# EAGLE board mainboard_eurobotics2010_r8 (EAGLE 4.16), part 1 of 2
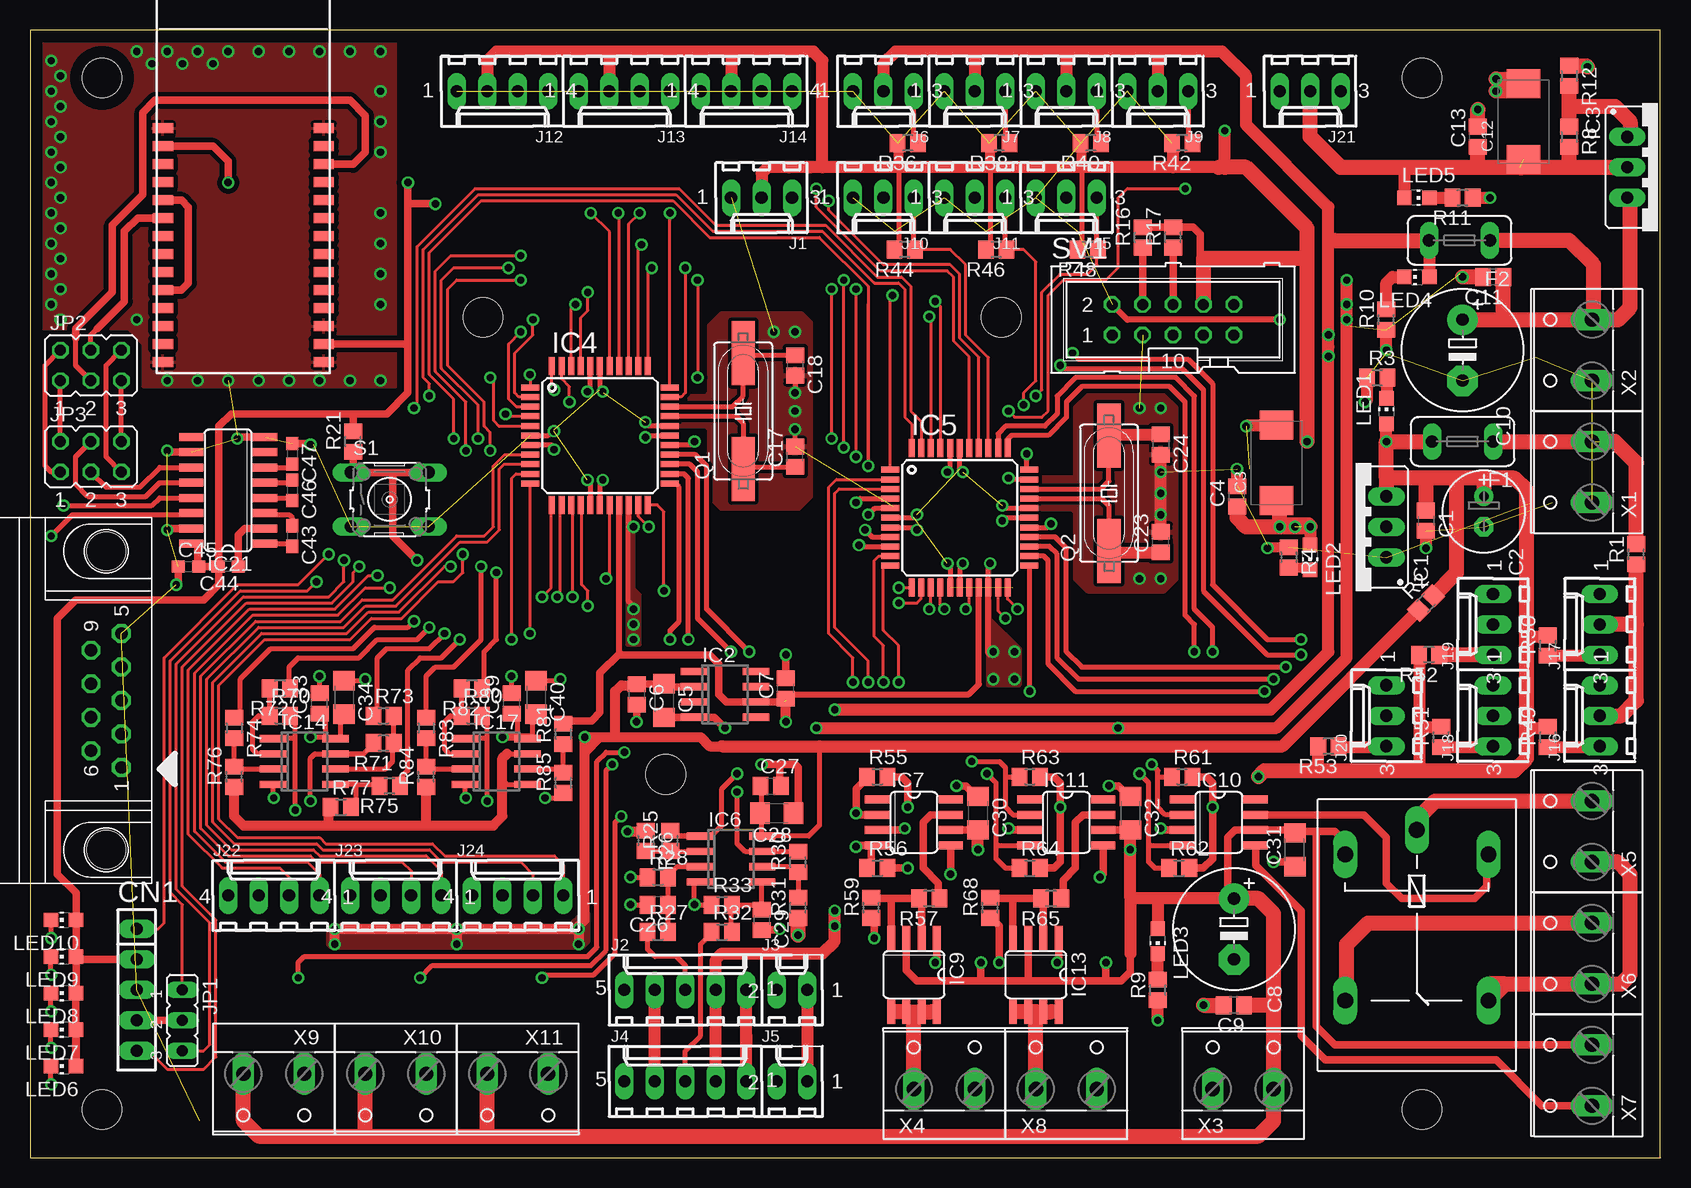
[diagram p0: board, top side]
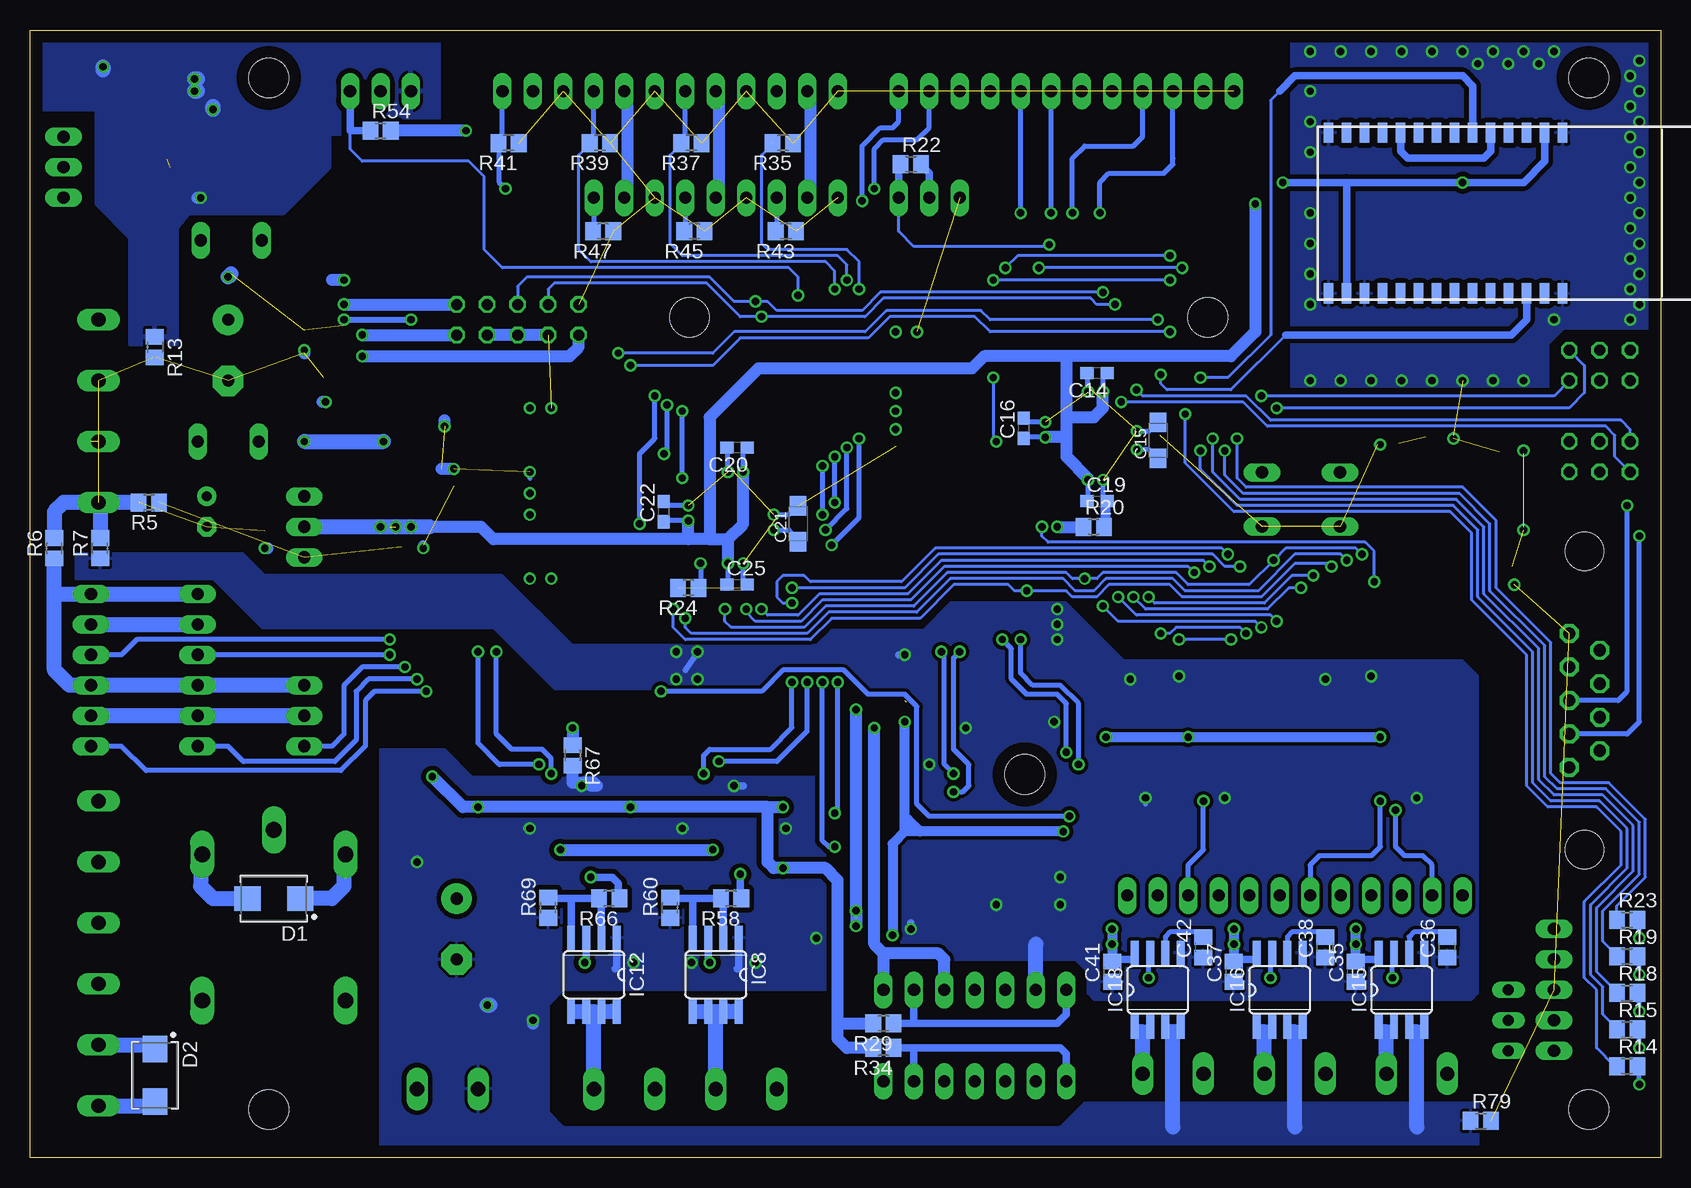
[diagram p1: board, bottom side, seen from below]

Size 135.89 x 94 mm. Coordinates in mm from the lower left corner, seen from the top.
Outline: 135.86,93.98 135.86,0.03 135.89,0 0,0 0,94 135.86,94
Copper layers (1*16): Top 0.035mm / dielectric 1.5mm / Bottom 0.035mm
Design rules "olimex": minimum track width 10mil, minimum drill 24mil, track to track 8mil, track to pad 8mil, pad to pad 8mil, via to via 8mil, smd to smd 8mil, copper to edge 40mil, drill to drill 8mil, minimum pad ring 8mil, minimum via ring 8mil, stop-mask expansion 4mil, vias tented up to drill 0mil, thermal gap 10mil
Holes 3.3 mm at 6,4 116,4 6,90 116,90 80.93,70.04 37.75,70.04 52.99,31.94

## Footprints (pad centres in the part's own frame; a part is rotated, then mirrored left to right if it is on the bottom)
C0805 = smd 1.3 x 1.5: 1 -0.85,0; 2 0.85,0
E2,5-7 = drill 0.813 pad 1.6 round: + -1.27,0 | drill 0.813 pad 1.6 octagon: - 1.27,0
SMC_D = smd 2.4 x 2.8: + -3.15,0; - 3.15,0
C1206 = smd 1.6 x 1.8: 1 -1.4,0; 2 1.4,0
E5-10,5 = drill 1.016 pad 2.54 round: + -2.54,0 | drill 1.016 pad 2.54 octagon: - 2.54,0
C0603 = smd 1.1 x 1: 1 -0.85,0; 2 0.85,0
SMC_A = smd 1.6 x 1.4: + -1.5,0; - 1.5,0
SIP-100-5V = drill 1.016 long: 1 -5.08,0; 2 -2.54,0; 3 0,0; 4 2.54,0; 5 5.08,0
D-09F/90 = drill 1.016 pad 1.575 octagon: 1 -5.588,-1.27; 2 -2.794,-1.27; 3 0,-1.27; 4 2.794,-1.27; 5 5.588,-1.27; 6 -4.191,1.27; 7 -1.397,1.27; 8 1.397,1.27; 9 4.191,1.27 | hole 3.2: 12.446,0; -12.446,0
DIOM5436X265N = smd 2.2 x 2.05: A 2.2,0; K -2.2,0
TE5 = drill 1.016 long: 1 -2.54,0; 2 2.54,0
317TS = drill 1.016 long: 1 -2.54,-2.54; 2 0,-2.54; 3 2.54,-2.54
SOIC8 = smd 0.6 x 2.2: 1 -1.905,-2.6; 2 -0.635,-2.6; 3 0.635,-2.6; 4 1.905,-2.6; 5 1.905,2.6; 6 0.635,2.6; 7 -0.635,2.6; 8 -1.905,2.6
TQFP44 = smd 1.5 x 0.5: 1 -5.8,4; 2 -5.8,3.2; 3 -5.8,2.4; 4 -5.8,1.6; 5 -5.8,0.8; 6 -5.8,0; 7 -5.8,-0.8; 8 -5.8,-1.6; 9 -5.8,-2.4; 10 -5.8,-3.2; 11 -5.8,-4; 23 5.8,-4; 24 5.8,-3.2; 25 5.8,-2.4; 26 5.8,-1.6; 27 5.8,-0.8; 28 5.8,0; 29 5.8,0.8; 30 5.8,1.6; 31 5.8,2.4; 32 5.8,3.2; 33 5.8,4 | smd 0.5 x 1.5: 12 -4,-5.8; 13 -3.2,-5.8; 14 -2.4,-5.8; 15 -1.6,-5.8; 16 -0.8,-5.8; 17 0,-5.8; 18 0.8,-5.8; 19 1.6,-5.8; 20 2.4,-5.8; 21 3.2,-5.8; 22 4,-5.8; 34 4,5.8; 35 3.2,5.8; 36 2.4,5.8; 37 1.6,5.8; 38 0.8,5.8; 39 0,5.8; 40 -0.8,5.8; 41 -1.6,5.8; 42 -2.4,5.8; 43 -3.2,5.8; 44 -4,5.8
SO08 = smd 0.6 x 2.2: 1 -1.905,-2.6; 2 -0.635,-2.6; 3 0.635,-2.6; 4 1.905,-2.6; 5 1.905,2.6; 6 0.635,2.6; 7 -0.635,2.6; 8 -1.905,2.6
SO08' = smd 0.66 x 2.032: 1 -1.905,-3.073; 2 -0.635,-3.073; 3 0.635,-3.073; 4 1.905,-3.073; 5 1.905,3.073; 6 0.635,3.073; 7 -0.635,3.073; 8 -1.905,3.073
WT11 = smd 1.7 x 0.8: 1 -6.7,2.5; 2 -6.7,1; 3 -6.7,-0.5; 4 -6.7,-2; 5 -6.7,-3.5; 6 -6.7,-5; 7 -6.7,-6.5; 8 -6.7,-8; 9 -6.7,-9.5; 10 -6.7,-11; 11 -6.7,-12.5; 12 -6.7,-14; 13 -6.7,-15.5; 14 -6.7,-17; 15 6.7,-17; 16 6.7,-15.5; 17 6.7,-14; 18 6.7,-12.5; 19 6.7,-11; 20 6.7,-9.5; 21 6.7,-8; 22 6.7,-6.5; 23 6.7,-5; 24 6.7,-3.5; 25 6.7,-2; 26 6.7,-0.5; 27 6.7,1; 28 6.7,2.5
SO16 = smd 0.66 x 2.032: 1 -4.445,-3.073; 2 -3.175,-3.073; 3 -1.905,-3.073; 4 -0.635,-3.073; 5 0.635,-3.073; 6 1.905,-3.073; 7 3.175,-3.073; 8 4.445,-3.073; 9 4.445,3.073; 10 3.175,3.073; 11 1.905,3.073; 12 0.635,3.073; 13 -0.635,3.073; 14 -1.905,3.073; 15 -3.175,3.073; 16 -4.445,3.073
6410-03 = drill 1.016 long: 1 2.54,0; 2 0,0; 3 -2.54,0
6410-05 = drill 1.016 long: 1 5.08,0; 2 2.54,0; 3 0,0; 4 -2.54,0; 5 -5.08,0
6410-02 = drill 1.016 long: 1 1.27,0; 2 -1.27,0
6410-04 = drill 1.016 long: 1 3.81,0; 2 1.27,0; 3 -1.27,0; 4 -3.81,0
JP2 = drill 0.914 long: 1 -2.54,0; 2 0,0; 3 2.54,0
JP3Q = drill 0.914 octagon: 1 -2.54,-1.27; 2 -2.54,1.27; 3 0,-1.27; 4 0,1.27; 5 2.54,-1.27; 6 2.54,1.27
G5LE = drill 1.321 long: 1 -7.493,-5.969; 2 -7.493,5.969; O 4.699,5.969; P -9.525,0; S 4.699,-5.969
CHIP-LED0805 = smd 1.2 x 1.2: A 0,-1.05; C 0,1.05
HC49UP = smd 5.334 x 1.93: 1 -4.826,0; 2 4.826,0
R0805 = smd 1.3 x 1.5: 1 -0.85,0; 2 0.85,0
B3F-10XX = drill 1.016 long: 1 -3.251,2.261; 2 3.251,2.261; 3 -3.251,-2.261; 4 3.251,-2.261
ML10 = drill 0.914 octagon: 1 -5.08,-1.27; 2 -5.08,1.27; 3 -2.54,-1.27; 4 -2.54,1.27; 5 0,-1.27; 6 0,1.27; 7 2.54,-1.27; 8 2.54,1.27; 9 5.08,-1.27; 10 5.08,1.27
W237-132 = drill 1.194 long: 1 -2.54,-0.635; 2 2.54,-0.635

## Placement (x,y rotation side)
C1  100nF  [C0805]  116.33,53.09 270 top
C2  220uF/10V  [E2,5-7]  121.16,53.85 270 top
C3  47uF/6V  [SMC_D]  103.89,57.91 90 top
C4  100nF  [C0805]  100.58,55.12 90 top
C5  10uF/10V  [C1206]  52.83,38.1 270 top
C6  100nF  [C0805]  50.55,38.61 270 top
C7  100nF  [C0805]  62.99,39.12 90 top
C8  220uF/35V  [E5-10,5]  100.33,19.05 270 top
C9  100nF  [C0805]  100.33,12.7 180 top
C10  220uF/35V  [E5-10,5]  119.38,67.31 270 top
C11  100nF  [C0805]  121.92,73.41 180 top
C12  47uF/16V  [SMC_D]  124.46,86.36 90 top
C13  100nF  [C0805]  120.65,85.09 90 top
C14  100nF  [C0603]  46.96,65.38 180 bottom
C15  10uF/6V/lowESR  [SMC_A]  41.88,59.79 90 bottom
C16  100nF  [C0603]  53.06,60.81 90 bottom
C17  22pF  [C0805]  63.75,58.42 90 top
C18  22pF  [C0805]  63.75,66.04 270 top
C19  100nF  [C0603]  46.96,54.71 0 bottom
C20  100nF  [C0603]  76.96,59.18 180 bottom
C21  10uF/6V/lowESR  [SMC_A]  71.88,52.83 90 bottom
C22  100nF  [C0603]  83.06,53.85 90 bottom
C23  22pF  [C0805]  94.23,51.31 90 top
C24  22pF  [C0805]  94.23,59.44 270 top
C25  100nF  [C0603]  76.96,47.75 0 bottom
C26  C1  [C0805]  52.32,21.08 180 top
C27  100nF  [C0805]  61.72,30.99 0 top
C28  10uF/10V  [C1206]  62.23,28.7 180 top
C29  C1  [C0805]  60.96,19.81 270 top
C30  10uF/35V  [C1206]  78.99,28.7 270 top
C31  10uF/35V  [C1206]  105.41,25.65 90 top
C32  10uF/35V  [C1206]  91.69,28.7 270 top
C33  100nF  [C0805]  24.13,37.85 90 top
C34  10uF/10V  [C1206]  26.16,38.35 270 top
C35  100nF  [C0805]  25.4,15.49 90 bottom
C36  100nF  [C0805]  17.78,17.53 90 bottom
C37  100nF  [C0805]  35.56,15.49 90 bottom
C38  100nF  [C0805]  27.94,17.53 90 bottom
C39  100nF  [C0805]  40.13,37.85 90 top
C40  10uF/10V  [C1206]  42.16,38.35 270 top
C41  100nF  [C0805]  45.72,15.49 90 bottom
C42  100nF  [C0805]  38.1,17.53 90 bottom
C43  100nF  [C0603]  21.84,51.82 270 top
C44  100nF  [C0603]  16.51,49.28 180 top
C45  100nF  [C0603]  13.21,49.28 0 top
C46  100nF  [C0603]  21.84,55.63 270 top
C47  100nF  [C0603]  21.84,58.67 270 top
CN1  [SIP-100-5V]  8.89,13.97 270 top
CON1  [D-09F/90]  6.35,38.1 90 top
D1  SS24  [DIOM5436X265N]  115.57,21.59 180 bottom
D2  SS24  [DIOM5436X265N]  125.48,6.86 270 bottom
F1  FUSETE5  [TE5]  119.38,59.69 180 top
F2  FUSETE5  [TE5]  119.13,76.45 180 top
IC1  LM1086CT-3.3  [317TS]  110.49,52.58 90 top
IC2  ADR443BRZ-R-8  [SOIC8]  57.91,38.61 270 top
IC3  LM338T  [317TS]  135.64,82.55 270 top
IC4  DSPIC33FJXXMC804SMD  [TQFP44]  47.5,60.2 0 top
IC5  DSPIC33FJXXMC804SMD  [TQFP44]  77.47,53.34 0 top
IC6  MCP6022SN  [SO08]  58.42,24.89 270 top
IC7  TC4427  [SO08']  73.66,27.94 270 top
IC8  IRF7389  [SO08']  78.74,15.24 180 bottom
IC9  IRF7389  [SO08']  73.66,15.24 180 top
IC10  TC4427  [SO08']  99.06,27.94 270 top
IC11  TC4427  [SO08']  86.36,27.94 270 top
IC12  IRF7389  [SO08']  88.9,15.24 180 bottom
IC13  IRF7389  [SO08']  83.82,15.24 180 top
IC14  MCP6022SN  [SO08]  22.86,33.02 270 top
IC15  ADS713  [SO08']  21.59,13.97 0 bottom
IC16  ADS713  [SO08']  31.75,13.97 0 bottom
IC17  MCP6022SN  [SO08]  38.86,33.02 270 top
IC18  ADS713  [SO08']  41.91,13.97 0 bottom
IC19  WT11A  [WT11]  17.78,83.31 0 top
IC20  WT11A  [WT11]  10.67,78.74 270 bottom
IC21  MAX232ACSE  [SO16]  16.51,55.63 90 top
J1  [6410-03]  60.96,80.01 180 top
J2  [6410-05]  54.61,13.97 0 top
J3  [6410-02]  63.5,13.97 0 top
J4  [6410-05]  54.61,6.35 0 top
J5  [6410-02]  63.5,6.35 0 top
J6  [6410-03]  71.12,88.9 180 top
J7  [6410-03]  78.74,88.9 180 top
J8  [6410-03]  86.36,88.9 180 top
J9  [6410-03]  93.98,88.9 180 top
J10  [6410-03]  71.12,80.01 180 top
J11  [6410-03]  78.74,80.01 180 top
J12  [6410-04]  39.37,88.9 180 top
J13  [6410-04]  49.53,88.9 180 top
J14  [6410-04]  59.69,88.9 180 top
J15  [6410-03]  86.36,80.01 180 top
J16  [6410-03]  130.81,36.83 90 top
J17  [6410-03]  130.81,44.45 90 top
J18  [6410-03]  121.92,36.83 90 top
J19  [6410-03]  121.92,44.45 90 top
J20  [6410-03]  113.03,36.83 90 top
J21  [6410-03]  106.68,88.9 180 top
J22  [6410-04]  20.32,21.84 0 top
J23  [6410-04]  30.48,21.84 0 top
J24  [6410-04]  40.64,21.84 0 top
JP1  [JP2]  12.7,11.43 270 top
JP2  [JP3Q]  5.08,66.04 0 top
JP3  [JP3Q]  5.08,58.42 0 top
K1  G5LE  [G5LE]  115.57,17.78 270 top
LED1  [CHIP-LED0805]  113.03,62.23 0 top
LED2  [CHIP-LED0805]  106.68,50.04 180 top
LED3  [CHIP-LED0805]  93.98,18.03 180 top
LED4  [CHIP-LED0805]  115.57,73.41 90 top
LED5  [CHIP-LED0805]  115.57,80.01 270 top
LED6  [CHIP-LED0805]  2.79,7.62 90 top
LED7  [CHIP-LED0805]  2.79,10.67 90 top
LED8  [CHIP-LED0805]  2.79,13.72 90 top
LED9  [CHIP-LED0805]  2.79,16.76 90 top
LED10  [CHIP-LED0805]  2.79,19.81 90 top
Q1  10MHz  [HC49UP]  59.44,62.23 90 top
Q2  10MHz  [HC49UP]  89.92,55.37 90 top
R1  0R  [R0805]  133.86,50.29 90 top
R2  0R  [R0805]  116.33,46.23 45 top
R3  470R  [R0805]  112.27,65.02 0 top
R4  270R  [R0805]  104.9,50.04 270 top
R5  0R  [R0805]  125.98,54.61 180 bottom
R6  0R  [R0805]  133.86,50.8 90 bottom
R7  0R  [R0805]  130.05,50.8 90 bottom
R8  240R/1%  [R0805]  128.27,85.09 270 top
R9  2K7  [R0805]  93.98,13.97 90 top
R10  1K  [R0805]  113.03,69.85 90 top
R11  1K  [R0805]  119.38,80.01 180 top
R12  1K6/1%  [R0805]  128.27,90.17 270 top
R13  0R  [R0805]  125.48,67.56 270 bottom
R14  270R  [R0805]  2.79,7.62 0 bottom
R15  270R  [R0805]  2.79,10.67 0 bottom
R16  4K7  [R0805]  92.71,76.71 90 top
R17  4K7  [R0805]  95.25,76.71 90 top
R18  270R  [R0805]  2.79,13.72 0 bottom
R19  270R  [R0805]  2.79,16.76 0 bottom
R20  0R  [R0805]  47.24,52.58 0 bottom
R21  10K  [R0805]  26.92,59.69 90 top
R22  4K7  [R0805]  62.48,82.8 0 bottom
R23  270R  [R0805]  2.79,19.81 0 bottom
R24  0R  [R0805]  81.03,47.5 180 bottom
R25  RD  [R0805]  53.34,26.42 90 top
R26  RC  [R0805]  51.31,26.42 270 top
R27  RA  [R0805]  52.32,18.8 0 top
R28  RB  [R0805]  52.32,23.37 0 top
R29  4K7  [R0805]  64.77,11.18 180 bottom
R30  RD  [R0805]  64.01,24.64 90 top
R31  RC  [R0805]  64.01,20.83 90 top
R32  RA  [R0805]  57.66,18.8 0 top
R33  RB  [R0805]  57.66,21.08 0 top
R34  4K7  [R0805]  64.77,9.14 180 bottom
R35  4K7  [R0805]  73.15,84.58 180 bottom
R36  4K7  [R0805]  73.15,84.58 180 top
R37  4K7  [R0805]  80.77,84.58 180 bottom
R38  4K7  [R0805]  80.77,84.58 180 top
R39  4K7  [R0805]  88.39,84.58 180 bottom
R40  4K7  [R0805]  88.39,84.58 180 top
R41  4K7  [R0805]  96.01,84.58 180 bottom
R42  4K7  [R0805]  96.01,84.58 180 top
R43  4K7  [R0805]  72.9,77.22 180 bottom
R44  4K7  [R0805]  72.9,75.69 180 top
R45  4K7  [R0805]  80.52,77.22 180 bottom
R46  4K7  [R0805]  80.52,75.69 180 top
R47  4K7  [R0805]  88.14,77.22 180 bottom
R48  4K7  [R0805]  88.14,75.69 180 top
R49  4K7  [R0805]  126.49,35.05 90 top
R50  4K7  [R0805]  126.49,42.67 90 top
R51  4K7  [R0805]  117.6,35.05 90 top
R52  4K7  [R0805]  116.59,41.91 180 top
R53  4K7  [R0805]  108.2,34.29 180 top
R54  4K7  [R0805]  106.68,85.6 0 bottom
R55  2K2  [R0805]  70.61,31.75 0 top
R56  2K2  [R0805]  70.61,24.13 0 top
R57  22R  [R0805]  74.93,21.59 180 top
R58  22R  [R0805]  77.47,21.59 180 bottom
R59  2K2  [R0805]  70.1,20.83 90 top
R60  2K2  [R0805]  82.55,20.83 90 bottom
R61  2K2  [R0805]  96.01,31.75 0 top
R62  2K2  [R0805]  95.76,24.13 0 top
R63  2K2  [R0805]  83.31,31.75 0 top
R64  2K2  [R0805]  83.31,24.13 0 top
R65  22R  [R0805]  85.09,21.59 180 top
R66  22R  [R0805]  87.63,21.59 180 bottom
R67  0R  [R0805]  90.68,33.53 270 bottom
R68  2K2  [R0805]  80.01,20.83 90 top
R69  2K2  [R0805]  92.71,20.83 90 bottom
R70  2K/1%  [R0805]  20.83,36.83 0 top
R71  2K/1%  [R0805]  29.46,34.54 180 top
R72  1K/1%  [R0805]  20.83,39.12 180 top
R73  1K/1%  [R0805]  29.46,36.83 0 top
R74  1K/1%  [R0805]  17.02,35.81 270 top
R75  1K/1%  [R0805]  29.97,30.99 180 top
R76  2K/1%  [R0805]  17.02,31.75 90 top
R77  2K/1%  [R0805]  25.91,29.21 0 top
R79  0R  [R0805]  14.99,3.05 0 bottom
R80  2K/1%  [R0805]  36.83,36.83 0 top
R81  1K/1%  [R0805]  44.45,35.31 90 top
R82  1K/1%  [R0805]  36.83,39.12 180 top
R83  1K/1%  [R0805]  33.02,35.81 270 top
R84  2K/1%  [R0805]  33.02,31.75 90 top
R85  2K/1%  [R0805]  44.45,31.24 90 top
S1  [B3F-10XX]  29.97,54.86 0 top
SV1  [ML10]  95.25,69.85 0 top
X1  [W237-132]  129.54,57.15 90 top
X2  [W237-132]  129.54,67.31 90 top
X3  [W237-132]  101.09,6.35 0 top
X4  [W237-132]  76.2,6.35 0 top
X5  [W237-132]  129.54,27.18 90 top
X6  [W237-132]  129.54,17.02 90 top
X7  [W237-132]  129.54,6.86 90 top
X8  [W237-132]  86.36,6.35 0 top
X9  [W237-132]  20.32,6.35 180 top
X10  [W237-132]  30.48,6.35 180 top
X11  [W237-132]  40.64,6.35 180 top

## Library data of the parts
C1-C47 R1-R77 R79-R85 = rcl
CN1 = con-hdrs40
CON1 = connect
D1 D2 = ipc-7351-diode
F1 F2 = fuse
IC1 IC3 = v-reg
IC2 IC4 IC5 IC7-IC13 IC15 IC16 IC18-IC20 = eagle_jbs_lib
IC6 IC14 IC17 = linear
IC21 = maxim-10
J1-J24 = con-molex
JP1-JP3 = jumper
K1 = relay
LED1-LED10 = led
Q1 Q2 = crystal
S1 = switch-omron
SV1 = con-harting-ml
X1-X11 = con-wago-508

## Nets
0V: C8.- C9.2 C30.1 C31.1 C32.1 IC7.3 IC8.1 IC9.1 IC10.3 IC11.3 IC12.1 IC13.1 IC15.3 IC15.4 IC16.3 IC16.4 IC18.3 IC18.4 R9.1 R59.1 R60.1 R67.2 R68.1 R69.1 R79.1 X3.1
+3V3: C3.+ C4.1 C14.1 C16.1 C19.1 C20.1 C22.1 C25.1 C44.2 C45.2 CN1.2 IC1.2 IC4.17 IC4.28 IC4.40 IC5.17 IC5.28 IC5.40 IC19.2 IC19.16 IC20.2 IC20.16 IC21.16 LED2.A LED6.A LED7.A LED8.A LED9.A LED10.A R21.2
+3V_VREF: C7.1 IC2.6 IC4.19 IC5.19 R26.1 R31.1 R81.2
+5V: C1.1 C2.+ F1.2 IC1.3 J1.2 J12.2 J13.2 J14.2 LED1.A R2.2 R16.2 R17.2 R22.2 R29.2 R34.2 R36.2 R38.2 R40.2 R42.2 R44.2 R46.2 R48.2 R49.2 R50.2 R51.2 R52.2 R53.2 R54.2 R55.2 R56.2 R61.2 R62.2 R63.2 R64.2 SV1.8
+5V_ANALOG: C5.1 C6.1 C27.1 C28.2 C33.1 C34.2 C35.2 C37.2 C39.1 C40.2 C41.2 IC2.2 IC6.8 IC14.8 IC15.8 IC16.8 IC17.8 IC18.8 R2.1
+12V: F2.2 J2.2 J4.2 J6.2 J7.2 J8.2 J9.2 J10.2 J11.2 J15.2 LED4.A SV1.1 SV1.9
+24V: C8.+ C9.1 C30.2 C31.2 C32.2 D1.K D2.K IC7.6 IC8.3 IC9.3 IC10.6 IC11.6 IC12.3 IC13.3 K1.1 LED3.A X3.2 X7.2 X9.2 X10.2 X11.2
AGND: C5.2 C6.2 C7.2 C26.2 C27.2 C28.1 C29.2 C33.2 C34.1 C35.1 C36.1 C37.1 C38.1 C39.2 C40.1 C41.1 C42.1 IC2.4 IC4.20 IC5.20 IC6.4 IC14.4 IC15.5 IC16.5 IC17.4 IC18.5 J2.4 J4.4 R7.1 R20.1 R24.1 R28.1 R33.1 R85.1
ARM_ENC_CHA: IC5.38 J14.3
ARM_ENC_CHB: IC5.37 J14.4
ARM_FC_DOWN_SENSOR: IC5.33 J11.3 R45.2 R46.1
ARM_FC_UP_SENSOR: IC5.27 J15.3 R47.2 R48.1
ARM_MOT_BREAK: IC5.13 J24.1
ARM_MOT_CURRENT: IC5.23 IC18.7
ARM_MOT_REV: IC5.12 J24.2
ARM_MOT_VREF_N: IC5.15 R82.1
ARM_MOT_VREF_P: IC5.14 R83.1
ARM_VREF: IC17.1 J24.3 R80.2
BEACON_UART_RX: IC4.1 IC20.26
BEACON_UART_TX: IC4.5 IC20.6
COMPRESSOR_POWER: IC5.35 IC10.2 R61.1
CORN_INSIDE_SENSOR: IC5.4 J8.3 R39.2 R40.1
CORN_PUSH_PWM_(5V): IC5.26 J20.3 R53.1
FROM_TX_RS232_M: CON1.3 IC21.13
G_RST: CN1.1 IC4.18 IC5.18 R21.1 S1.1 S1.2
GND: C3.- C4.2 C14.2 C15.- C16.2 C17.2 C18.2 C19.2 C20.2 C21.- C22.2 C23.2 C24.2 C25.2 C45.1 C47.1 CN1.3 CON1.5 IC1.1 IC4.6 IC4.16 IC4.29 IC4.39 IC5.6 IC5.16 IC5.29 IC5.39 IC19.1 IC19.14 IC19.15 IC19.17 IC19.28 IC20.1 IC20.14 IC20.15 IC20.17 IC20.28 IC21.8 IC21.10 IC21.15 J1.1 R4.1 R5.1 R20.2 R24.2 R79.2 S1.3 S1.4 SV1.3 SV1.5 SV1.7
GND_SERVO_5V: J16.1 J17.1 J18.1 J19.1 J20.1 R6.1
GND_SERVO_9.6V: C12.- C13.2 J21.1 R11.1 R12.1 R13.1
GNDIO: C1.2 C2.- C10.- C11.2 J2.1 J3.1 J4.1 J5.1 J6.1 J7.1 J8.1 J9.1 J10.1 J11.1 J12.1 J13.1 J14.1 J15.1 R3.1 R5.2 R6.2 R7.2 R10.1 R13.2 R35.1 R37.1 R39.1 R41.1 R43.1 R45.1 R47.1 R67.1 SV1.2 SV1.10 X1.1 X2.1
I2C_SCL_(5V): IC4.42 IC5.42 R16.1 SV1.4
I2C_SDA_(5V): IC4.41 IC5.41 R17.1 SV1.6
L_BALL_IN_SENSOR: IC5.8 J7.3 R37.2 R38.1
L_BALLS_LID_PWM_(5V): IC4.2 J17.3 R50.1
L_CORN_HOLD_PWM_(5V): IC5.24 J16.3 R49.1
L_CORN_MOT_INA_(5V): IC5.10 IC11.2 R63.1
L_CORN_MOT_INB_(5V): IC5.11 IC11.4 R64.1
L_ENC_CHA: IC4.36 J13.3
L_ENC_CHB: IC4.33 J13.4
L_MOT_BREAK: IC4.13 J22.1
L_MOT_CURRENT: IC4.24 IC15.7
L_MOT_REV: IC4.12 J22.2
L_MOT_VREF: IC14.1 J22.3 R70.2
L_MOT_VREF_N: IC4.15 R72.1
L_MOT_VREF_P: IC4.14 R74.1
LASER_BALL_SCAN: IC4.26 IC6.1 R25.2
LASER_CORN_SCAN: IC4.25 IC6.7 R30.2
MAIN_LED1: IC4.34 R18.1
MAIN_LED2: IC4.32 R19.1
MAIN_LED3: IC4.27 R15.1
MAIN_LED4: IC4.4 R14.1
MAIN_PGED: IC4.21 JP1.1
MAIN_UART_RX: IC4.44 JP2.1 JP3.2
MAIN_UART_TX: IC4.43 JP2.2 JP3.1
N$1: LED10.C R23.2
N$2: IC8.5 IC8.6 IC8.7 IC8.8 X4.2
N$3: IC3.1 R8.1 R12.2
N$4: IC9.5 IC9.6 IC9.7 IC9.8 X4.1
N$5: J2.3 R27.1
N$6: IC8.2 IC8.4 R58.2 R60.2
N$7: IC9.2 IC9.4 R57.2 R59.2
N$8: LED8.C R18.2
N$10: LED9.C R19.2
N$11: LED7.C R15.2
N$12: LED5.C R11.2
N$13: LED6.C R14.2
N$14: IC7.7 R57.1
N$15: IC7.5 R58.1
N$16: IC20.5 IC20.10
N$17: IC12.5 IC12.6 IC12.7 IC12.8 X8.2
N$18: IC13.5 IC13.6 IC13.7 IC13.8 X8.1
N$19: IC12.2 IC12.4 R66.2 R69.2
N$20: IC13.2 IC13.4 R65.2 R68.2
N$21: IC11.7 R65.1
N$22: IC11.5 R66.1
N$23: D1.A IC10.7 K1.2
N$24: K1.O X5.1 X6.1
N$25: J4.5 J5.2 R34.1
N$26: K1.P X5.2
N$27: C43.2 IC21.1
N$28: J2.5 J3.2 R29.1
N$30: C43.1 IC21.3
N$31: C46.2 IC21.4
N$32: C46.1 IC21.5
N$33: C44.1 IC21.2
N$34: C47.2 IC21.6
N$35: K1.S X6.2
N$36: IC6.2 R25.1 R26.2
N$38: D2.A IC10.5 X7.1
N$40: C26.1 IC6.3 R27.2 R28.2
N$43: C10.+ C11.1 F2.1 IC3.3 X2.2
N$47: C18.1 IC4.31 Q1.2
N$48: C17.1 IC4.30 Q1.1
N$49: C15.+ IC4.7
N$50: C24.1 IC5.31 Q2.2
N$51: C23.1 IC5.30 Q2.1
N$52: C21.+ IC5.7
N$61: IC14.2 R70.1 R72.2
N$64: LED1.C R3.2
N$65: LED2.C R4.2
N$66: LED4.C R10.2
N$67: LED3.C R9.2
N$70: IC14.3 R74.2 R76.2
N$71: IC14.6 R71.1 R73.2
N$72: IC15.1 IC15.2 X9.1
N$73: C36.2 IC15.6
N$74: IC14.5 R75.2 R77.2
N$75: IC17.6 R81.1 R85.2
N$76: IC16.1 IC16.2 X10.1
N$77: C38.2 IC16.6
N$78: IC18.1 IC18.2 X11.1
N$79: C42.2 IC18.6
N$83: IC17.2 R80.1 R82.2
N$84: IC17.3 R83.2 R84.2
N$93: IC19.5 IC19.10
N$94: IC6.6 R30.1 R31.2
N$95: C29.1 IC6.5 R32.2 R33.2
N$96: J4.3 R32.1
N$112: F1.1 R1.2 X1.2
PGEC: CN1.5 IC4.22 IC5.22
PGED: CN1.4 JP1.2
R_BALL_IN_SENSOR: IC5.9 J6.3 R35.2 R36.1
R_BALLS_LID_PWM_(5V): IC4.3 J19.3 R52.1
R_CORN_HOLD_PWM_(5V): IC5.25 J18.3 R51.1
R_CORN_MOT_INA_(5V): IC5.2 IC7.2 R55.1
R_CORN_MOT_INB_(5V): IC5.3 IC7.4 R56.1
R_ENC_CHA: IC4.38 J12.3
R_ENC_CHB: IC4.37 J12.4
R_MOT_BREAK: IC4.9 J23.1
R_MOT_CURRENT: IC4.23 IC16.7
R_MOT_REV: IC4.8 J23.2
R_MOT_VREF: IC14.7 J23.3 R71.2
R_MOT_VREF_N: IC4.11 R73.1
R_MOT_VREF_P: IC4.10 R75.1
RX_MAX232: IC21.12 JP3.4
RX_WT11: IC19.6 JP2.4
SERVOS_UART_(5V): IC5.1 J21.3 R54.1
SLAVE_LED1: IC5.5 R23.1
SLAVE_PGED: IC5.21 JP1.3
SLAVE_UART_RX: IC5.44 JP2.5 JP3.6
SLAVE_UART_TX: IC5.43 JP2.6 JP3.5
START: IC4.35 J1.3 R22.1
SUCKER_OBJ_SENSOR: IC5.36 J10.3 R43.2 R44.1
TO_RX_RS232_M: CON1.2 IC21.14
TX_MAX232: IC21.11 JP3.3
TX_WT11: IC19.26 JP2.3
VACUUM_REV: IC5.34 IC10.4 R62.1
VACUUM_SENSOR: IC5.32 J9.3 R41.2 R42.1
VCC_SERVO_5V: J16.2 J17.2 J18.2 J19.2 J20.2 R1.1
VCC_SERVO_9.6V: C12.+ C13.1 IC3.2 J21.2 LED5.A R8.2
VOFF_2V: IC17.5 IC17.7 R76.1 R77.1 R84.1